# Altium PCB ZMBo 1.1.PcbDoc (part 3 of 4)
Units mil, origin at the board's own origin, x right, y up, seen from the top; angles counter-clockwise.
Board outline 6000 x 4000 mil, 4 copper layers (Top Layer, Groun Plane, Power Plane, Bottom Layer); 280 components, 251 nets, 1047 pads, 1788 vias.
Unrouted connection lines stored in the file: 231.
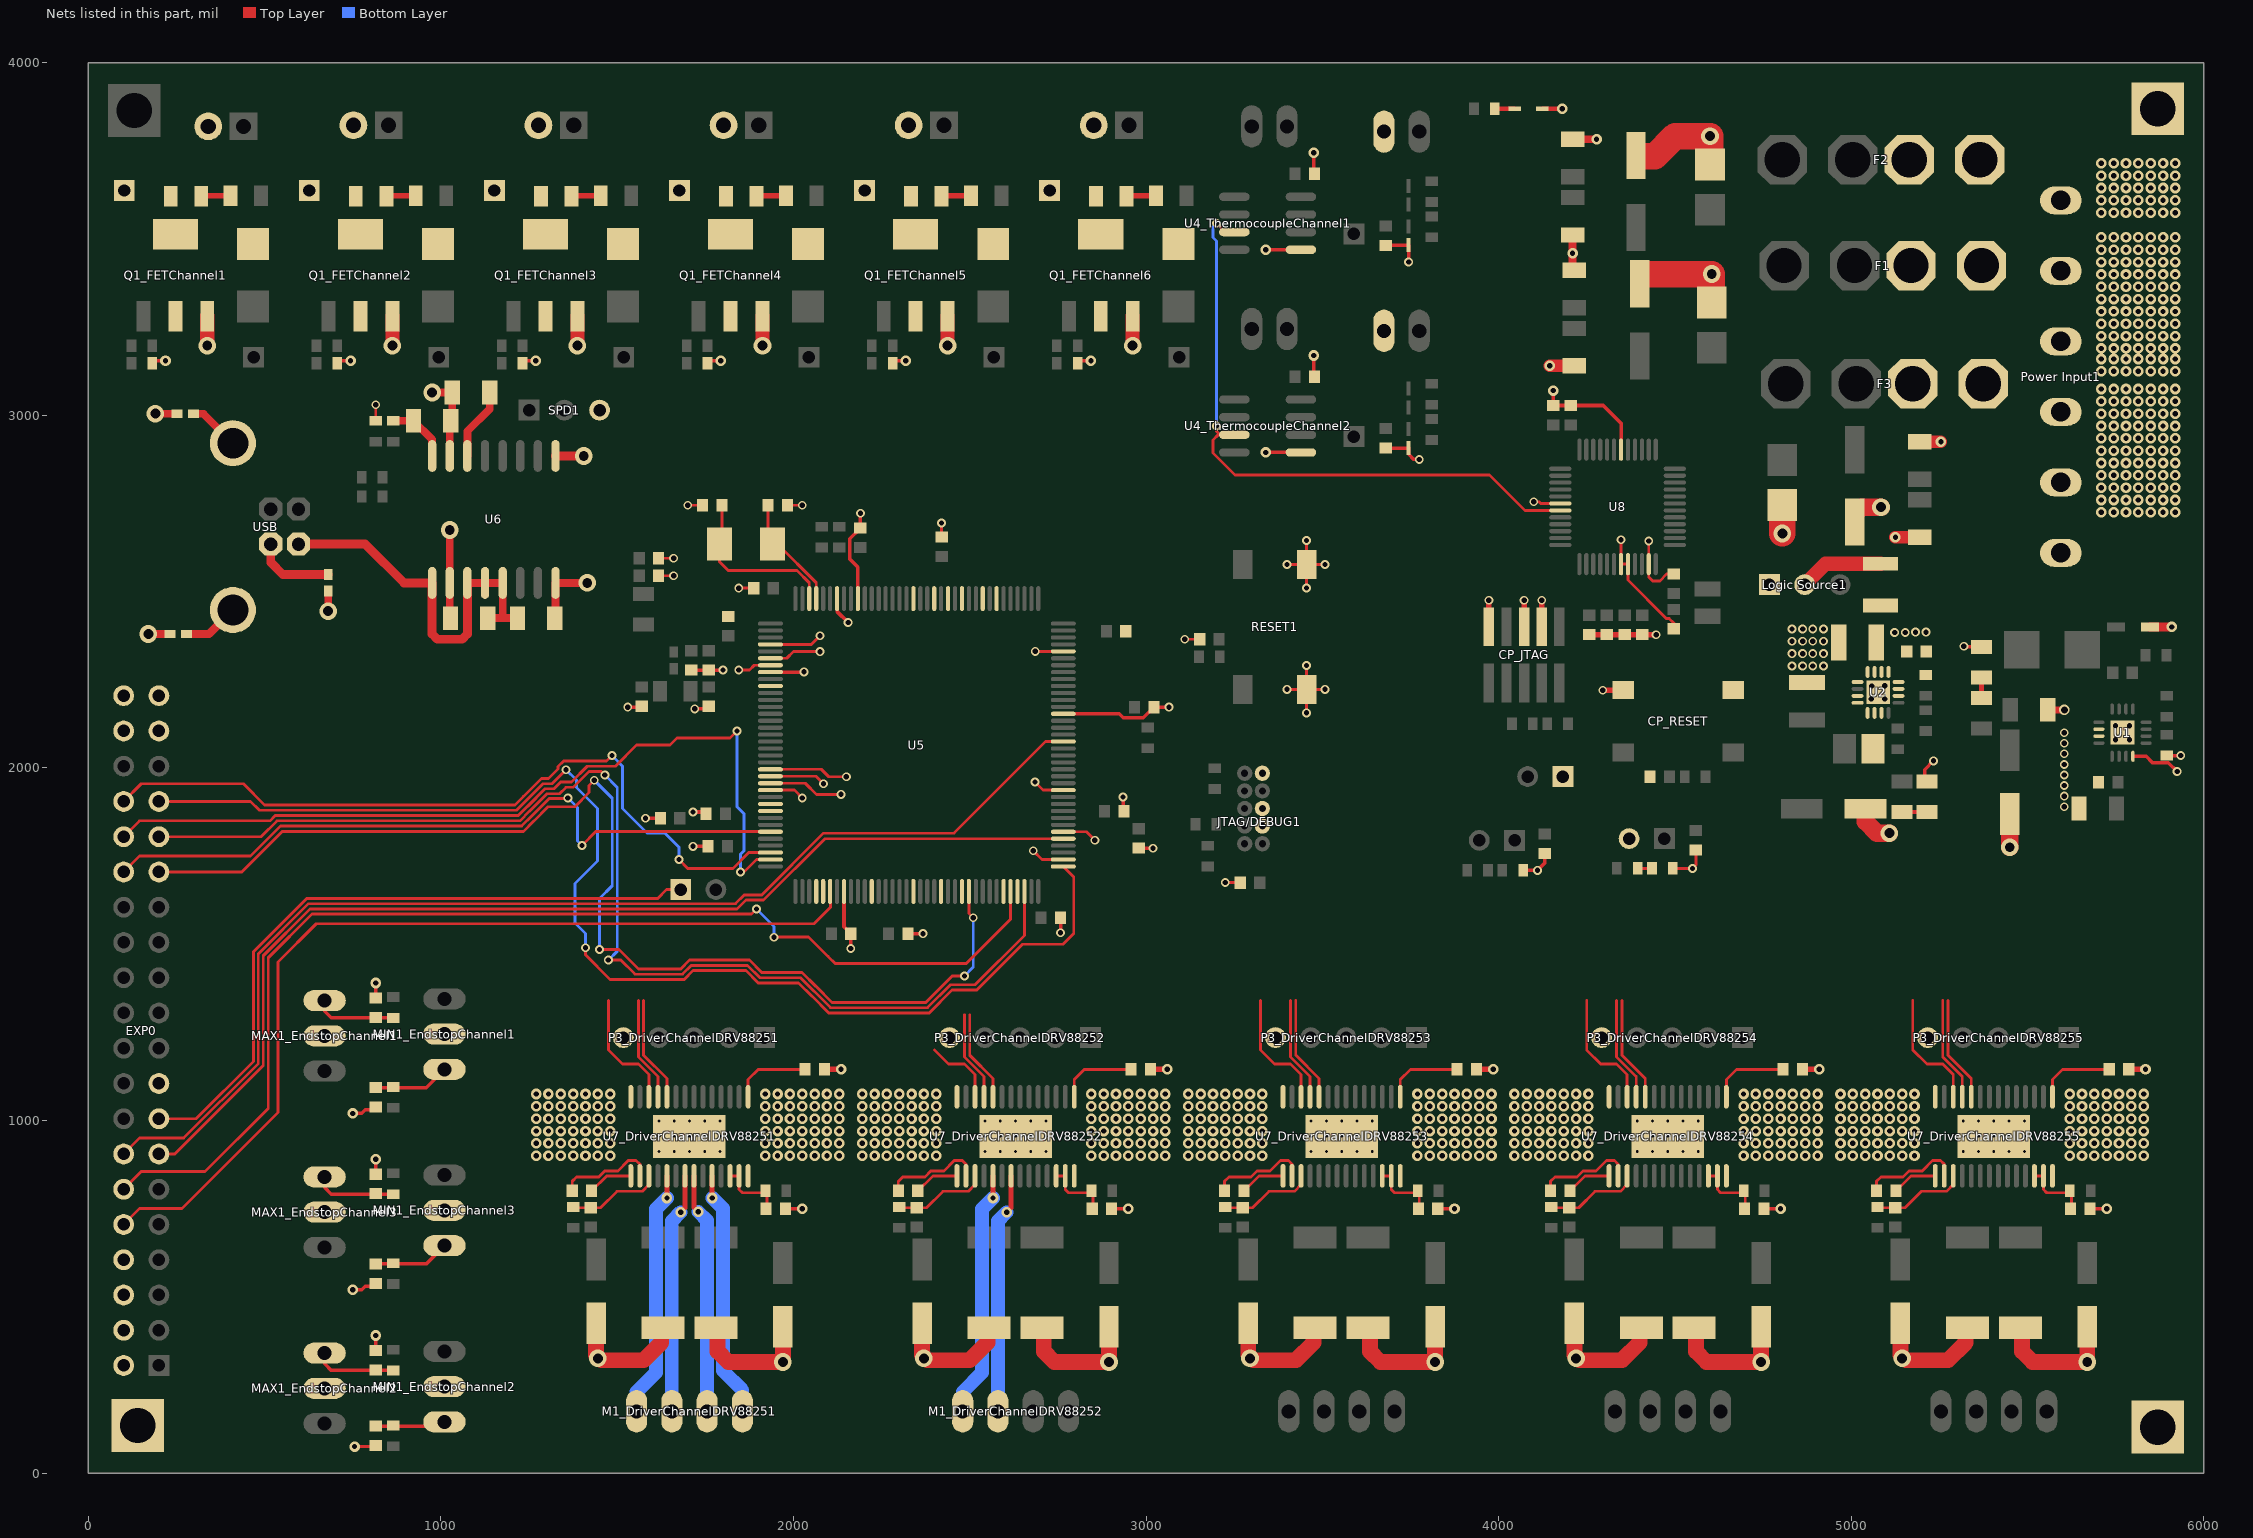
[diagram p5: the nets of this part, all layers, seen from the top]

## Via types
v1: diameter 30, hole 15, Top Layer to Bottom Layer, 1271 vias
v2: diameter 25, hole 15, Top Layer to Bottom Layer, 410 vias
v3: diameter 19.68, hole 7.87, Top Layer to Bottom Layer, 75 vias
v4: diameter 50, hole 28, Top Layer to Bottom Layer, 30 vias
v5: diameter 30, hole 20, Top Layer to Bottom Layer, 2 vias

## Nets (pads, with @x,y where several pads share a name; then routed paths per layer and width w, separated by ;. In a path a pad name is that pad's centre, name@x,y a point inside that pad or via, vN(x,y) a via of type N, cw(c..) or ccw(c..) an arc to the next point about the centre after c; other vN are vias at no path point) (continued)
GND: "Power Input1.2" "Power Input1.4" "Power Input1.6" C1_EndstopChannel1.2 C1_EndstopChannel2.2 C1_EndstopChannel3.2 C2_EndstopChannel1.2 C2_EndstopChannel2.2 C2_EndstopChannel3.2 C3.2 C4.2 C5.1 C6.1 C8.1 C9.2 C10.1 C11.1 C12.2 C14.1 C15.1 C16.2 C18.1 C19.1 C22.2 C23.2 C24.1 C30_ThermistorChannel1.1 C30_ThermistorChannel2.1 C31_ThermocoupleChannel1.1 C31_ThermocoupleChannel2.1 C32.1 C33.1 C36.1 C37.1 C38.1 C39.1 C40.1 C41.1 C42.1 C43.1 C44.1 C45.1 C46.1 C47.1 C48.1 C49.1 C50.1 C51.1 C54.1 C55.1 C56.1 C57.1 C60.1 C61.1 C62.1 C63.1 C64.1 C65.1 C67_DriverChannelDRV88251.1 C67_DriverChannelDRV88252.1 C67_DriverChannelDRV88253.1 C67_DriverChannelDRV88254.1 C67_DriverChannelDRV88255.1 C69_DriverChannelDRV88251.2 C69_DriverChannelDRV88252.2 C69_DriverChannelDRV88253.2 C69_DriverChannelDRV88254.2 C69_DriverChannelDRV88255.2 C70_DriverChannelDRV88251.2 C70_DriverChannelDRV88252.2 C70_DriverChannelDRV88253.2 C70_DriverChannelDRV88254.2 C70_DriverChannelDRV88255.2 C71_DriverChannelDRV88251.1 C71_DriverChannelDRV88252.1 C71_DriverChannelDRV88253.1 C71_DriverChannelDRV88254.1 C71_DriverChannelDRV88255.1 C72.2 C73.2 C74.1 C75.1 C76.1 C77.1 C78.2 C79.2 C80.2 CP_JTAG.3 CP_JTAG.5 CP_JTAG.9 CP_RESET.1 D1.1 D4.1 D5.1 D6.1 D7.1 D8.1 D9.1 D12_ThermistorChannel1.1 D12_ThermistorChannel2.1 EXP0.2 EXP0.4 EXP0.6 EXP0.8 JTAG/DEBUG1.3 JTAG/DEBUG1.5 JTAG/DEBUG1.9 MAX1_EndstopChannel1.2 MAX1_EndstopChannel2.2 MAX1_EndstopChannel3.2 MIN1_EndstopChannel1.2 MIN1_EndstopChannel2.2 MIN1_EndstopChannel3.2 P2_ThermistorChannel1.2 P2_ThermistorChannel2.2 P3_DriverChannelDRV88251.5 P3_DriverChannelDRV88252.5 P3_DriverChannelDRV88253.5 P3_DriverChannelDRV88254.5 P3_DriverChannelDRV88255.5 pad.@140,135 pad.@5870,130 pad.@5870,3870 Q1_FETChannel1.3 Q1_FETChannel2.3 Q1_FETChannel3.3 Q1_FETChannel4.3 Q1_FETChannel5.3 Q1_FETChannel6.3 R6_FETChannel1.2 R6_FETChannel2.2 R6_FETChannel3.2 R6_FETChannel4.2 R6_FETChannel5.2 R6_FETChannel6.2 R10.1 R15.2 R28.1 R29.2 R32_DriverChannelDRV88251.1 R32_DriverChannelDRV88252.1 R32_DriverChannelDRV88253.1 R32_DriverChannelDRV88254.1 R32_DriverChannelDRV88255.1 R33_DriverChannelDRV88251.1 R33_DriverChannelDRV88252.1 R33_DriverChannelDRV88253.1 R33_DriverChannelDRV88254.1 R33_DriverChannelDRV88255.1 R38.1 RESET1.2 SPD1.3 U1.4 U1.14 U1.15 U1.17 U2.6 U2.7 U2.8 U2.15 U2.16 U2.17 U4_ThermocoupleChannel1.1 U4_ThermocoupleChannel2.1 U5.8 U5.44 U5.61 U5.95 U5.104 U5.115 U5.135 U5.138 U6.9 U6.15 U7_DriverChannelDRV88251.14 U7_DriverChannelDRV88251.28 U7_DriverChannelDRV88251.29 U7_DriverChannelDRV88252.14 U7_DriverChannelDRV88252.28 U7_DriverChannelDRV88252.29 U7_DriverChannelDRV88253.14 U7_DriverChannelDRV88253.28 U7_DriverChannelDRV88253.29 U7_DriverChannelDRV88254.14 U7_DriverChannelDRV88254.28 U7_DriverChannelDRV88254.29 U7_DriverChannelDRV88255.14 U7_DriverChannelDRV88255.28 U7_DriverChannelDRV88255.29 U8.7 U8.8 U8.11 U8.30 | length 11511.3
  Top Layer w8: v1(755,75) 812.09,75 C1_EndstopChannel2.2@815,77.91 ; R15.2@815,2984.53 v2(815,3030) ; v4@1404.88,2885.12 v4(1405,2885) ; C32.1@1617.56,2545 v2(1660,2545) ; C33.1@1617.56,2595 v2(1660,2595) ; v2(1700,2745) C44.1@1742.44,2745 ; v2(1845,2510) C51.1@1887.44,2510 ; C43.1@1982.56,2745 v2(2025,2745) ; C42.1@2420,2655.12 v2(2420,2695) ; v2@2685,2330 v2(2685.75,2330.75) U5.104@2765.35,2330.75 ; v2(3110,2365) C63.1@3152.44,2365 ; v2(3225,1675) C62.1@3267.44,1675 ; v2(3400,2222.83) RESET1.2@3455.55,2222.83 ; v2(3400,2577.17) RESET1.2@3455.55,2577.17 ; v2(3455.55,2156.22) RESET1.2@3455.55,2222.83 ; v2(3455.55,2290.67) RESET1.2@3455.55,2222.83 ; v2(3455.55,2510.55) RESET1.2@3455.55,2577.17 ; v2(3455.55,2645) RESET1.2@3455.55,2577.17 ; v2(3507.83,2222.83) RESET1.2@3455.55,2222.83 ; v2(3507.83,2577.17) RESET1.2@3455.55,2577.17 ; v2(4347.44,2647.44) U8.7@4347.44,2578.07 U8.8@4367.13,2578.07 4367.13,2532.75 4475.74,2424.14 4484.02,2424.14 4497.6,2410.55 C72.2@4497.6,2394.77 ; v2(4426.18,2643.82) U8.11@4426.18,2578.07 4426.18,2541.97 4437.6,2530.55 4457.6,2530.55 4476.93,2549.88 C73.2@4497.6,2549.88 ; R29.2@4494.53,1715 v2(4550,1715) 4560,1725 C60.1@4560,1767.44
  Top Layer w10: R6_FETChannel1.2@188.22,3155 v1(218.69,3155) ; R6_FETChannel2.2@713.22,3155 v1(743.69,3155) ; v1(750,520) 775,520 785,530 815,530 C1_EndstopChannel3.2@815,537.91 ; v1(750,1020) 775,1020 785,1030 815,1030 C1_EndstopChannel1.2@815,1037.91 ; C2_EndstopChannel2.2@815,347.56 v1(815,390) ; C2_EndstopChannel3.2@815,847.56 v1(815,890) ; C2_EndstopChannel1.2@815,1347.56 v1(815,1390) ; C57.1@1025,2981.85 C57.1@1028.15,2985 C57.1@1031.85,2988.7 ; R6_FETChannel3.2@1238.22,3155 v1(1268.69,3155) ; v2(1530,2172.56) 1567.56,2172.56 C64.1@1570,2175 ; v2(1580,1857.56) C45.1@1622.44,1857.56 ; C54.1@1710,2277.44 1710.12,2277.56 v2(1800,2277.56) ; v2(1715,1777.56) C39.1@1757.44,1777.56 ; v2(1715,1875) C40.1@1752.44,1875 ; v2(1720,2167.56) 1752.56,2167.56 C65.1@1760,2175 ; R6_FETChannel4.2@1763.22,3155 v1(1793.69,3155) ; U5.8@1934.65,2271.69 2029.13,2271.69 v2(2030,2272.56) ; C67_DriverChannelDRV88251.1@1977.56,750 v1(2025,750) ; U5.138@2123.62,2480.35 2123.62,2443.94 v2(2155,2412.56) ; U5.44@2143.31,1649.65 2143.31,1549.25 C46.1@2162.56,1530 v2(2162.56,1487.56) ; U5.135@2182.68,2480.35 2182.68,2569.88 2160,2592.56 2160,2650.12 C50.1@2190,2680.12 v2(2190,2722.56) ; R6_FETChannel5.2@2288.22,3155 v1(2318.69,3155) ; C41.1@2325,1530 v2(2367.44,1530) ; v2(2757.56,1532.56) C47.1@2757.56,1575 ; U5.95@2765.35,2153.58 2923.98,2153.58 2935,2142.56 2992.56,2142.56 C49.1@3022.56,2172.56 v2(3065,2172.56) ; R6_FETChannel6.2@2813.22,3155 v1(2843.69,3155) ; C67_DriverChannelDRV88252.1@2902.56,750 v1(2950,750) ; v2(2935,1917.56) 2935,1880.12 C38.1@2937.56,1877.56 ; C48.1@2980,1772.44 v2(3020,1772.44) ; v1(3340,2895) U4_ThermocoupleChannel2.1@3439.49,2895 ; v1(3340,3470) U4_ThermocoupleChannel1.1@3439.49,3470 ; C31_ThermocoupleChannel2.1@3475.51,3112.56 v1(3475.51,3170) ; C31_ThermocoupleChannel1.1@3475.51,3687.56 v1(3475.51,3745) ; C30_ThermistorChannel2.1@3680,2907.44 3744.49,2907.44 D12_ThermistorChannel2.1@3745,2907.95 3745,2890 3760,2875 v2(3775,2875) ; C30_ThermistorChannel1.1@3680,3482.44 3744.49,3482.44 D12_ThermistorChannel1.1@3745,3482.95 v2(3745,3435) ; C67_DriverChannelDRV88253.1@3827.56,750 v1(3875,750) ; R28.1@4070,1709.53 v2(4110.47,1709.53) 4130.47,1729.53 C61.1@4130.47,1756.97 ; v1(4155.04,3070.55) C76.1@4155.04,3028.11 C77.1@4205.04,3028.11 4297.48,3028.11 4347.44,2978.15 U8.30@4347.44,2902.87 ; C67_DriverChannelDRV88254.1@4752.56,750 v1(4800,750) ; D9.1@5215.08,1961.69 5208.58,1968.19 5208.58,1995.04 v2(5233.58,2020.04) ; v2(5320,2345) 5321.61,2343.39 D7.1@5370,2343.39 ; C67_DriverChannelDRV88255.1@5677.56,750 v1(5725,750) ; U1.4@5799.53,2033.07 5836.93,2033.07 5855,2015 5900,2015 v2(5925,1990) ; R10.1@5895.47,2035 v2(5935,2035)
  Top Layer w12: D1.1@4124.37,3870 v1(4180.47,3870)
  Top Layer w15: C71_DriverChannelDRV88251.1@2087.56,1145 v1(2135.12,1145) ; C71_DriverChannelDRV88252.1@3012.56,1145 v1(3060.12,1145) ; C71_DriverChannelDRV88253.1@3937.56,1145 v1(3985.12,1145) ; CP_JTAG.9@3972.6,2400.39 v2(3972.6,2475.47) ; CP_JTAG.5@4072.6,2400.39 v2(4072.6,2475.47) ; CP_JTAG.3@4122.6,2400.39 v2(4122.6,2475.47) ; C75.1@4257.6,2377.99 C74.1@4307.6,2377.99 v2(4447.01,2377.99) ; v2(4295.55,2220.55) CP_RESET.1@4354.13,2220.55 ; C71_DriverChannelDRV88254.1@4862.56,1145 v1(4910.12,1145) ; C71_DriverChannelDRV88255.1@5787.56,1145 v1(5835.12,1145)
  Top Layer w20: C8.1@5558.15,2165 v5(5605,2165)
  Top Layer w22: v4(975,3065) C56.1@1031.85,3065 C57.1@1031.85,2988.7 ; U6.15@1025,2885.12 C57.1@1025,2981.85 ; C14.1@4210,3416.81 C6.1@4210,3511.85 ; C5.1@4210,3783.15 v1(4278.15,3783.15)
  Top Layer w25: U6.9@1325,2885.12 v4@1404.88,2885.12 ; D5.1@5848.23,2400 v1(5910,2400)
  Top Layer w35: v1(4145,3140.51) C15.1@4215,3140.51 ; v1(5125.79,2654.21) C18.1@5195,2654.21 ; C19.1@5195,2925.51 v1@5254.49,2925.51
  Top Layer w40: v4@337.24,3198.08 Q1_FETChannel1.3@337.24,3281.86 ; v4@862.24,3198.08 Q1_FETChannel2.3@862.24,3281.86 ; v4@1387.24,3198.08 Q1_FETChannel3.3@1387.24,3281.86 ; v4@1912.24,3198.08 Q1_FETChannel4.3@1912.24,3281.86 ; v4@2437.24,3198.08 Q1_FETChannel5.3@2437.24,3281.86 ; v4@2962.24,3198.08 Q1_FETChannel6.3@2962.24,3281.86
  Top Layer w45: C69_DriverChannelDRV88251.2@1440,414.45 1440,335 1455,320 1575,320 1625,370 R33_DriverChannelDRV88251.1@1625,412.05 ; R32_DriverChannelDRV88251.1@1785,412.05 1785,345 1815,315 v4(1970,315) C70_DriverChannelDRV88251.2@1970,414.45 ; C69_DriverChannelDRV88252.2@2365,414.45 2365,335 2380,320 2500,320 2550,370 R33_DriverChannelDRV88252.1@2550,412.05 ; R32_DriverChannelDRV88252.1@2710,412.05 2710,345 2740,315 v4(2895,315) C70_DriverChannelDRV88252.2@2895,414.45 ; C69_DriverChannelDRV88253.2@3290,414.45 3290,335 3305,320 3425,320 3475,370 R33_DriverChannelDRV88253.1@3475,412.05 ; R32_DriverChannelDRV88253.1@3635,412.05 3635,345 3665,315 v4(3820,315) C70_DriverChannelDRV88253.2@3820,414.45 ; C69_DriverChannelDRV88254.2@4215,414.45 4215,335 4230,320 4350,320 4400,370 R33_DriverChannelDRV88254.1@4400,412.05 ; R32_DriverChannelDRV88254.1@4560,412.05 4560,345 4590,315 v4(4745,315) C70_DriverChannelDRV88254.2@4745,414.45 ; C69_DriverChannelDRV88255.2@5140,414.45 5140,335 5155,320 5275,320 5325,370 R33_DriverChannelDRV88255.1@5325,412.05 ; R32_DriverChannelDRV88255.1@5485,412.05 5485,345 5515,315 v4(5670,315) C70_DriverChannelDRV88255.2@5670,414.45
  Top Layer w50: C16.2@5010,2697.64 5010,2720 5030,2740 v4(5085,2740) ; C23.2@5041.13,1884.31 5041.13,1847.49 5073.58,1815.04 v4(5108.58,1815.04) ; v4(5450,1775) C9.2@5450,1869.45
  Top Layer w75: C3.2@4405,3735 4443.5,3735 4500.86,3792.36 v4(4600,3792.36) D4.1@4600,3711.34 ; 4427.64,3401.02 v4(4605,3401.02) D6.1@4605,3320 ; v4(4805,2665) D8.1@4805,2746.02
  other v1: 1270,900 1305,900 1340,900 1375,900 1410,900 1445,900 1480,900 1920,900 1955,900 1990,900 2025,900 2060,900 2095,900 2130,900 2195,900 2230,900 2265,900 2300,900 2335,900 2370,900 2405,900 2845,900 2880,900 2915,900 2950,900 2985,900 3020,900 3055,900 3120,900 3155,900 3190,900 3225,900 3260,900 3295,900 3330,900 3770,900 3805,900 3840,900 3875,900 3910,900 3945,900 3980,900 4045,900 4080,900 4115,900 4150,900 4185,900 4220,900 4255,900 4695,900 4730,900 4765,900 4800,900 4835,900 4870,900 4905,900 4970,900 5005,900 5040,900 5075,900 5110,900 5145,900 5180,900 5620,900 5655,900 5690,900 5725,900 5760,900 5795,900 5830,900 1270,935 1305,935 1340,935 1375,935 1410,935 1445,935 1480,935 1920,935 1955,935 1990,935 2025,935 2060,935 2095,935 2130,935 2195,935 2230,935 2265,935 2300,935 2335,935 2370,935 2405,935 2845,935 2880,935 2915,935 2950,935 2985,935 3020,935 3055,935 3120,935 3155,935 3190,935 3225,935 3260,935 3295,935 3330,935 3770,935 3805,935 3840,935 3875,935 3910,935 3945,935 3980,935 4045,935 4080,935 4115,935 4150,935 4185,935 4220,935 4255,935 4695,935 4730,935 4765,935 4800,935 4835,935 4870,935 4905,935 4970,935 5005,935 5040,935 5075,935 5110,935 5145,935 5180,935 5620,935 5655,935 5690,935 5725,935 5760,935 5795,935 5830,935 1270,970 1305,970 1340,970 1375,970 1410,970 1445,970 1480,970 1920,970 1955,970 1990,970 2025,970 2060,970 2095,970 2130,970 2195,970 2230,970 2265,970 2300,970 2335,970 2370,970 2405,970 2845,970 2880,970 2915,970 2950,970 2985,970 3020,970 3055,970 3120,970 3155,970 3190,970 3225,970 3260,970 3295,970 3330,970 3770,970 3805,970 3840,970 3875,970 3910,970 3945,970 3980,970 4045,970 4080,970 4115,970 4150,970 4185,970 4220,970 4255,970 4695,970 4730,970 4765,970 4800,970 4835,970 4870,970 4905,970 4970,970 5005,970 5040,970 5075,970 5110,970 5145,970 5180,970 5620,970 5655,970 5690,970 5725,970 5760,970 5795,970 5830,970 1270,1005 1305,1005 1340,1005 1375,1005 1410,1005 1445,1005 1480,1005 1920,1005 1955,1005 1990,1005 2025,1005 2060,1005 2095,1005 2130,1005 2195,1005 2230,1005 2265,1005 2300,1005 2335,1005 2370,1005 2405,1005 2845,1005 2880,1005 2915,1005 2950,1005 2985,1005 3020,1005 3055,1005 3120,1005 3155,1005 3190,1005 3225,1005 3260,1005 3295,1005 3330,1005 3770,1005 3805,1005 3840,1005 3875,1005 3910,1005 3945,1005 3980,1005 4045,1005 4080,1005 4115,1005 4150,1005 4185,1005 4220,1005 4255,1005 4695,1005 4730,1005 4765,1005 4800,1005 4835,1005 4870,1005 4905,1005 4970,1005 5005,1005 5040,1005 5075,1005 5110,1005 5145,1005 5180,1005 5620,1005 5655,1005 5690,1005 5725,1005 5760,1005 5795,1005 5830,1005 1270,1040 1305,1040 1340,1040 1375,1040 1410,1040 1445,1040 1480,1040 1920,1040 1955,1040 1990,1040 2025,1040 2060,1040 2095,1040 2130,1040 2195,1040 2230,1040 2265,1040 2300,1040 2335,1040 2370,1040 2405,1040 2845,1040 2880,1040 2915,1040 2950,1040 2985,1040 3020,1040 3055,1040 3120,1040 3155,1040 3190,1040 3225,1040 3260,1040 3295,1040 3330,1040 3770,1040 3805,1040 3840,1040 3875,1040 3910,1040 3945,1040 3980,1040 4045,1040 4080,1040 4115,1040 4150,1040 4185,1040 4220,1040 4255,1040 4695,1040 4730,1040 4765,1040 4800,1040 4835,1040 4870,1040 4905,1040 4970,1040 5005,1040 5040,1040 5075,1040 5110,1040 5145,1040 5180,1040 5620,1040 5655,1040 5690,1040 5725,1040 5760,1040 5795,1040 5830,1040 1270,1075 1305,1075 1340,1075 1375,1075 1410,1075 1445,1075 1480,1075 1920,1075 1955,1075 1990,1075 2025,1075 2060,1075 2095,1075 2130,1075 2195,1075 2230,1075 2265,1075 2300,1075 2335,1075 2370,1075 2405,1075 2845,1075 2880,1075 2915,1075 2950,1075 2985,1075 3020,1075 3055,1075 3120,1075 3155,1075 3190,1075 3225,1075 3260,1075 3295,1075 3330,1075 3770,1075 3805,1075 3840,1075 3875,1075 3910,1075 3945,1075 3980,1075 4045,1075 4080,1075 4115,1075 4150,1075 4185,1075 4220,1075 4255,1075 4695,1075 4730,1075 4765,1075 4800,1075 4835,1075 4870,1075 4905,1075 4970,1075 5005,1075 5040,1075 5075,1075 5110,1075 5145,1075 5180,1075 5620,1075 5655,1075 5690,1075 5725,1075 5760,1075 5795,1075 5830,1075 5255,2925 4210,3460
  other v2: 5605,1890 5605,1920 5605,1950 5605,1980 5605,2010 5605,2040 5605,2070 5750,2080 5790,2080 5605,2100 5750,2120 5790,2120 5057.58,2195.31 5095.58,2195.31 5058.58,2232.31 5095.58,2233.31 4832.58,2289.31 4862.58,2289.31 4891.58,2289.31 4921.58,2289.31 4832.58,2324.31 4862.58,2324.31 4891.58,2324.31 4921.58,2324.31 4832.58,2359.31 4862.58,2359.31 4891.58,2359.31 4921.58,2359.31 5123.58,2384.31 5153.58,2384.31 5182.58,2385.31 5212.58,2385.31 4832.58,2394.31 4862.58,2394.31 4891.58,2394.31 4921.58,2394.31
  other v3: 1618.39,911.69 1661.69,911.69 1705,911.69 1748.31,911.69 1791.61,911.69 2543.39,911.69 2586.69,911.69 2630,911.69 2673.31,911.69 2716.61,911.69 3468.39,911.69 3511.69,911.69 3555,911.69 3598.31,911.69 3641.61,911.69 4393.39,911.69 4436.69,911.69 4480,911.69 4523.31,911.69 4566.61,911.69 5318.39,911.69 5361.69,911.69 5405,911.69 5448.31,911.69 5491.61,911.69 1618.39,955 1661.69,955 1705,955 1748.31,955 1791.61,955 2543.39,955 2586.69,955 2630,955 2673.31,955 2716.61,955 3468.39,955 3511.69,955 3555,955 3598.31,955 3641.61,955 4393.39,955 4436.69,955 4480,955 4523.31,955 4566.61,955 5318.39,955 5361.69,955 5405,955 5448.31,955 5491.61,955 1618.39,998.31 1661.69,998.31 1705,998.31 1748.31,998.31 1791.61,998.31 2543.39,998.31 2586.69,998.31 2630,998.31 2673.31,998.31 2716.61,998.31 3468.39,998.31 3511.69,998.31 3555,998.31 3598.31,998.31 3641.61,998.31 4393.39,998.31 4436.69,998.31 4480,998.31 4523.31,998.31 4566.61,998.31 5318.39,998.31 5361.69,998.31 5405,998.31 5448.31,998.31 5491.61,998.31
  other v4: 1445,325 2370,325 3295,325 4220,325 5145,325 337.17,3198 862.17,3198 1387.17,3198 1912.17,3198 2437.17,3198 2962.17,3198
GPIO0_EXP: EXP0.37 U5.7 | length 95.4
  Top Layer w8: v2(1845,2277.56) 1875,2277.56 1888.82,2291.38 U5.7@1934.65,2291.38
GPIO1_EXP: EXP0.38 U5.10
GPIO2_EXP: EXP0.39 U5.27
GPIO3_EXP: EXP0.40 U5.28
I2C_SCL: EXP0.13 U5.77 | length 3118.1
  Top Layer w8: EXP0.13@200,905 245,905 496,1156 496,1467.21 628.79,1600 1840,1600 1865,1625 1915,1625 2089.25,1799.25 U5.77@2765.35,1799.25
I2C_SDA: EXP0.14 U5.91 | length 3332.2
  Top Layer w8: EXP0.14@100,905 145,950 270.2,950 482,1161.8 482,1473.01 623.99,1615 1835.2,1615 1860.2,1640 1910,1640 2085,1815 2455,1815 2714.84,2074.84 U5.91@2765.35,2074.84
INPUT_GND: C58.1 C59.1 FB6.1 FB7.1 FB8.1 U6.2 U6.8 | length 625.4
  Top Layer w22: v4(170,2380) FB6.1@231.38,2380 ; v4(190,3005) FB8.1@251.38,3005 ; v4(680,2445) FB7.1@680,2501.38 ; v4@1025,2680 U6.2@1025,2524.88 1025,2426.85 C59.1@1026.85,2425 ; C58.1@1323.15,2425 1325,2426.85 U6.8@1325,2524.88 v4(1414.88,2524.88)
  other v4: 1025,2675
KRESET: EXP0.15 kRESET.1 P4.1 | length 1931.5
  Top Layer w8: EXP0.15@200,1005 305.4,1005 468,1167.6 468,1478.8 619.2,1630 1615,1630 1640,1655 kRESET.1@1680,1655
MAX_ES: C2_EndstopChannel1.1 C2_EndstopChannel2.1 C2_EndstopChannel3.1 MAX1_EndstopChannel1.1 MAX1_EndstopChannel2.1 MAX1_EndstopChannel3.1 R3_EndstopChannel1.2 R3_EndstopChannel2.2 R3_EndstopChannel3.2 | length 698.7
  Top Layer w10: MAX1_EndstopChannel2.1@670,340 670,310 689.06,290.94 R3_EndstopChannel2.2@865,290.94 ; MAX1_EndstopChannel3.1@670,840 670,810 689.06,790.94 R3_EndstopChannel3.2@865,790.94 ; MAX1_EndstopChannel1.1@670,1340 670,1310 689.06,1290.95 R3_EndstopChannel1.2@865,1290.95
MAX_ES1: U5.24 | length 213.5
  Top Layer w8: U5.24@1934.65,1956.73 2033.27,1956.73 2065,1925 v2(2135,1925)
MAX_ES2: U5.22 | length 224.1
  Top Layer w8: U5.22@1934.65,1996.1 2078.9,1996.1 2100,1975 v2(2150,1975)
MAX_ES3: U5.4 | length 150.5
  Top Layer w8: U5.4@1934.65,2350.43 2050.43,2350.43 v2(2075,2375)
MIN_ES: C1_EndstopChannel1.1 C1_EndstopChannel2.1 C1_EndstopChannel3.1 MIN1_EndstopChannel1.1 MIN1_EndstopChannel2.1 MIN1_EndstopChannel3.1 R2_EndstopChannel1.2 R2_EndstopChannel2.2 R2_EndstopChannel3.2 | length 633
  Top Layer w10: C1_EndstopChannel2.1@815,133.03 998.03,133.03 MIN1_EndstopChannel2.1@1010,145 ; C1_EndstopChannel3.1@815,593.03 958.03,593.03 MIN1_EndstopChannel3.1@1010,645 ; C1_EndstopChannel1.1@815,1093.03 958.03,1093.03 MIN1_EndstopChannel1.1@1010,1145
MIN_ES1: U5.25 | length 99.5
  Top Layer w8: U5.25@1934.65,1937.05 2002.95,1937.05 v2(2025,1915)
MIN_ES2: U5.23 | length 159.2
  Top Layer w8: U5.23@1934.65,1976.42 2063.58,1976.42 v2(2085,1955)
MIN_ES3: U5.6 | length 148.2
  Top Layer w8: U5.6@1934.65,2311.06 1981.06,2311.06 2000,2330 v2(2075,2330)
MISO: EXP0.12 U4_ThermocoupleChannel1.7 U4_ThermocoupleChannel2.7 U5.68 U8.43 | length 5137.3
  Top Layer w8: EXP0.12@100,805 150,855 330.6,855 510,1034.4 510,1461.41 634.59,1586 1881,1586 v2(1895,1600) ; v2(1945,1520) 2043.06,1520 2098.12,1464.94 2098.45,1464.94 2118.39,1445 2490,1445 2615.75,1570.75 U5.68@2615.75,1649.65 ; v2(3200,2970) 3200,2955 U4_ThermocoupleChannel2.7@3210,2945 ; v2(3200,3545) 3225,3520 U4_ThermocoupleChannel1.7@3250.51,3520 ; U4_ThermocoupleChannel2.7@3250.51,2945 U4_ThermocoupleChannel2.7@3210,2945 ; U8.43@4175.2,2730.63 4075,2730.63 3974.63,2831 3252.17,2831 3190,2893.17 3190,2930 3205,2945 U4_ThermocoupleChannel2.7@3210,2945
  Bottom Layer w8: v2(1895,1600) 1945,1550 v2(1945,1520) ; v2(3200,2970) 3200,3495 3190,3505 3190,3535 v2(3200,3545)
MOD0E1: U5.117
MOD0E2: U5.120
MOD0E3: U5.122
MOD0E4: U5.124
MOD0E5: U5.127
MOD1E1: U5.40
MOD1E2: U5.41
MOD1E3: U5.48
MOD1E4: U5.54
MOD1E5: U5.58
MOD2E1: U5.67
MOD2E2: U5.69
MOD2E3: U5.74 | length 95.6
  Top Layer w8: v2(2680,1765) 2704.8,1740.2 U5.74@2765.35,1740.2
MOD2E4: U5.78 | length 99.6
  Top Layer w8: U5.78@2765.35,1818.94 2831.06,1818.94 v2(2855,1795)
MOD2E5: U5.84 | length 89.9
  Top Layer w8: v2(2685,1960) 2707.95,1937.05 U5.84@2765.35,1937.05
MODE0: U7_DriverChannelDRV88251.24 U7_DriverChannelDRV88252.24 U7_DriverChannelDRV88253.24 U7_DriverChannelDRV88254.24 U7_DriverChannelDRV88255.24 | length 1460.7
  Top Layer w8: 1575,1340 1575,1185 1641.02,1118.98 U7_DriverChannelDRV88251.24@1641.02,1067.2 ; 2500,1300 2500,1185 2566.02,1118.98 U7_DriverChannelDRV88252.24@2566.02,1067.2 ; 3425,1340 3425,1185 3491.02,1118.98 U7_DriverChannelDRV88253.24@3491.02,1067.2 ; 4350,1340 4350,1185 4416.02,1118.98 U7_DriverChannelDRV88254.24@4416.02,1067.2 ; 5275,1340 5275,1185 5341.02,1118.98 U7_DriverChannelDRV88255.24@5341.02,1067.2
MODE0_EXP1: EXP0.29 U5.62 | length 3274.5
  Top Layer w8: EXP0.29@200,1705 434.8,1705 549.8,1820 1233.78,1820 1263.28,1849.5 1263.49,1849.5 1303.99,1890 1380,1890 1420,1930 1420,1950 v2(1435,1965) ; v2(1450,1485) 1505,1485 1560,1430 1680.4,1430 1705.4,1455 1875,1455 1910,1420 2024.27,1420 2063.33,1380.94 2063.66,1380.94 2109.6,1335 2375.4,1335 2450.4,1410 v2(2485,1410) ; U5.62@2497.64,1649.65 2497.64,1587.36 v2(2510,1575)
  Bottom Layer w8: v2(1435,1965) 1486,1914 1486,1666 1450,1630 v2(1450,1485) ; v2(2485,1410) 2510,1435 v2(2510,1575)
MODE0_EXP2: EXP0.30 U5.31 | length 2049.6
  Top Layer w8: EXP0.30@100,1705 145,1750 460,1750 545,1835 1228.98,1835 1257.48,1863.5 1257.7,1863.5 1307.2,1913 1358,1913 v2(1360,1915) ; v2(1400,1780) 1439.28,1819.28 1934.31,1819.28 U5.31@1934.65,1818.94
  Bottom Layer w8: v2(1360,1915) 1387.5,1887.5 1387.5,1792.5 v2(1400,1780)
MODE1: U7_DriverChannelDRV88251.25 U7_DriverChannelDRV88252.25 U7_DriverChannelDRV88253.25 U7_DriverChannelDRV88254.25 U7_DriverChannelDRV88255.25 | length 1438.8
  Top Layer w8: 1560,1340 1560,1180 1615.43,1124.57 U7_DriverChannelDRV88251.25@1615.43,1067.2 ; 2485,1300 2485,1180 2540.43,1124.57 U7_DriverChannelDRV88252.25@2540.43,1067.2 ; 3410,1340 3410,1180 3465.43,1124.57 U7_DriverChannelDRV88253.25@3465.43,1067.2 ; 4335,1340 4335,1180 4390.43,1124.57 U7_DriverChannelDRV88254.25@4390.43,1067.2 ; 5260,1340 5260,1180 5315.43,1124.57 U7_DriverChannelDRV88255.25@5315.43,1067.2
MODE1_EXP1: EXP0.31 U5.70 | length 3361.9
  Top Layer w8: EXP0.31@200,1805 490,1805 535,1850 1224.19,1850 1251.69,1877.5 1251.9,1877.5 1301.4,1927 1337,1927 1355,1945 1375,1945 1420,1990 1455,1990 v2(1465,1980) ; v2(1475,1455) 1510,1455 1550,1415 1685.2,1415 1710.2,1440 1870,1440 1905,1405 2019.47,1405 2057.53,1366.94 2057.86,1366.94 2104.8,1320 2380.2,1320 2445.2,1385 2515,1385 2655,1525 2655,1649.53 U5.70@2655.12,1649.65
  Bottom Layer w8: v2(1465,1980) 1500,1945 1500,1480 v2(1475,1455)
MODE1_EXP2: EXP0.32 U5.35 | length 2375.9
  Top Layer w8: EXP0.32@100,1805 145,1850 515,1850 530,1865 1219.39,1865 1245.89,1891.5 1246.1,1891.5 1295.6,1941 1321,1941 1340,1960 1370,1960 1415,2005 1495,2005 1555,2065 1650,2065 1670,2085 1820,2085 v2(1840,2105) ; v2(1850,1705) 1860,1705 1895.2,1740.2 U5.35@1934.65,1740.2
  Bottom Layer w8: v2(1840,2105) 1840,1890 1860,1870 1860,1765 1850,1755 v2(1850,1705)
MODE2: U7_DriverChannelDRV88251.26 U7_DriverChannelDRV88252.26 U7_DriverChannelDRV88253.26 U7_DriverChannelDRV88254.26 U7_DriverChannelDRV88255.26 | length 1593.6
  Top Layer w8: 1475,1340 1475,1200 1515,1160 1560,1160 1589.84,1130.16 U7_DriverChannelDRV88251.26@1589.84,1067.2 ; 2400,1200 2440,1160 2485,1160 2514.84,1130.16 U7_DriverChannelDRV88252.26@2514.84,1067.2 ; 3325,1340 3325,1200 3365,1160 3410,1160 3439.84,1130.16 U7_DriverChannelDRV88253.26@3439.84,1067.2 ; 4250,1340 4250,1200 4290,1160 4335,1160 4364.84,1130.16 U7_DriverChannelDRV88254.26@4364.84,1067.2 ; 5175,1340 5175,1200 5215,1160 5260,1160 5289.84,1130.16 U7_DriverChannelDRV88255.26@5289.84,1067.2
MODE2_EXP1: EXP0.33 U5.73 | length 3583.8
  Top Layer w8: EXP0.33@200,1905 460,1905 485,1880 1214.59,1880 1240.09,1905.5 1240.3,1905.5 1289.8,1955 1315,1955 v2(1355,1995) ; v2(1410,1490) 1410,1470 1480,1400 1690,1400 1715,1425 1865,1425 1900,1390 2014.67,1390 2051.73,1352.94 2052.06,1352.94 2100,1305 2385,1305 2450,1370 2520,1370 2650,1500 2765,1500 2795,1530 2795,1690.87 U5.73@2765.35,1720.51
  Bottom Layer w8: v2(1355,1995) 1384.5,1965.5 1384.5,1944.08 1444,1884.58 1444,1735.82 1380,1671.82 1380,1560 1410,1530 v2(1410,1490)
MODE2_EXP2: EXP0.34 U5.34 | length 2184.1
  Top Layer w8: EXP0.34@100,1905 150,1955 440,1955 500,1895 1209.79,1895 1234.29,1919.5 1234.5,1919.5 1285,1970 1305,1970 1332.5,1997.5 1332.5,2004.32 1348.18,2020 1470,2020 v2(1485,2035) ; v2(1675,1740) 1700,1715 1828.18,1715 1873.06,1759.88 U5.34@1934.65,1759.88
  Bottom Layer w8: v2(1485,2035) 1515,2005 1515,1885 1585,1815 1635,1815 1675,1775 v2(1675,1740)
MOSI: EXP0.10 U5.42 U8.42 | length 2750.2
  Top Layer w8: EXP0.10@100,705 145,750 265.2,750 538,1022.8 538,1449.81 646.19,1558 2058,1558 2105,1605 2105,1648.58 U5.42@2103.94,1649.65 ; v2(4100,2755) 4115,2755 4119.69,2750.32 U8.42@4175.2,2750.32
NetC22_1: C22.1 F4.1 U2.10 U2.11 U2.12 U2.13
NetC24_2: C24.2 U2.9
NetC43_2: C43.2 U5.141 X2.1 | length 330.2
  Top Layer w8: C43.2@1927.44,2745 1927.44,2647.56 X2.1@1940,2635 1955,2635 2064.57,2525.43 U5.141@2064.57,2480.35
NetC44_2: C44.2 U5.142 X2.2 | length 487.5
  Top Layer w8: X2.2@1790,2635 1790,2585 1815,2560 2010.2,2560 2044.88,2525.32 U5.142@2044.88,2480.35 ; X2.2@1790.39,2635 1790.39,2645.39 1797.56,2652.56 C44.2@1797.56,2745
NetC56_2: "Logic Source1.1" C56.2 U6.14 | length 206
  Top Layer w22: U6.14@1075,2885.12 1075,2955 1138.15,3018.15 C56.2@1138.15,3065
NetC57_2: C57.2 R16.2 U6.16 | length 178.9
  Top Layer w22: R16.2@865,2984.53 921.38,2984.53 C57.2@921.85,2985 975,2931.85 U6.16@975,2885.12
NetC58_2: C58.2 C59.2 U6.1 U6.3 U6.4 U6.5 USB.1 | length 1110.4
  Top Layer w22: U6.3@1075,2524.88 U6.4@1125,2524.88 U6.5@1175,2524.88 1175,2425 ; C59.2@1133.15,2425 1175,2425 ; C58.2@1216.85,2425 1175,2425
  Top Layer w25: USB.1@596,2635 785,2635 895.12,2524.88 U6.1@975,2524.88 975,2380 990,2365 1060,2365 1075,2380 U6.3@1075,2524.88
NetC66_DriverChannelDRV88251_2: C66_DriverChannelDRV88251.2 R30_DriverChannelDRV88251.2 U7_DriverChannelDRV88251.3 | length 266.8
  Top Layer w8: R30_DriverChannelDRV88251.2@1375,752.56 1452.56,752.56 1499,799 1570.92,799 1589.84,817.93 U7_DriverChannelDRV88251.3@1589.84,842.8
NetC66_DriverChannelDRV88252_2: C66_DriverChannelDRV88252.2 R30_DriverChannelDRV88252.2 U7_DriverChannelDRV88252.3 | length 266.8
  Top Layer w8: R30_DriverChannelDRV88252.2@2300,752.56 2377.56,752.56 2424,799 2495.92,799 2514.84,817.93 U7_DriverChannelDRV88252.3@2514.84,842.8
NetC66_DriverChannelDRV88253_2: C66_DriverChannelDRV88253.2 R30_DriverChannelDRV88253.2 U7_DriverChannelDRV88253.3 | length 266.8
  Top Layer w8: R30_DriverChannelDRV88253.2@3225,752.56 3302.56,752.56 3349,799 3420.92,799 3439.84,817.93 U7_DriverChannelDRV88253.3@3439.84,842.8
NetC66_DriverChannelDRV88254_2: C66_DriverChannelDRV88254.2 R30_DriverChannelDRV88254.2 U7_DriverChannelDRV88254.3 | length 266.8
  Top Layer w8: R30_DriverChannelDRV88254.2@4150,752.56 4227.56,752.56 4274,799 4345.92,799 4364.84,817.93 U7_DriverChannelDRV88254.3@4364.84,842.8
NetC66_DriverChannelDRV88255_2: C66_DriverChannelDRV88255.2 R30_DriverChannelDRV88255.2 U7_DriverChannelDRV88255.3 | length 266.8
  Top Layer w8: R30_DriverChannelDRV88255.2@5075,752.56 5152.56,752.56 5199,799 5270.92,799 5289.84,817.93 U7_DriverChannelDRV88255.3@5289.84,842.8
NetC67_DriverChannelDRV88251_2: C67_DriverChannelDRV88251.2 R31_DriverChannelDRV88251.1 U7_DriverChannelDRV88251.12 U7_DriverChannelDRV88251.13 | length 213.4
  Top Layer w8: U7_DriverChannelDRV88251.12@1820.16,842.8 U7_DriverChannelDRV88251.13@1845.75,842.8 1845.75,804.25 1855,795 1910,795 1925,810 C67_DriverChannelDRV88251.2@1925,750
NetC67_DriverChannelDRV88252_2: C67_DriverChannelDRV88252.2 R31_DriverChannelDRV88252.1 U7_DriverChannelDRV88252.12 U7_DriverChannelDRV88252.13 | length 213.4
  Top Layer w8: U7_DriverChannelDRV88252.12@2745.16,842.8 U7_DriverChannelDRV88252.13@2770.75,842.8 2770.75,804.25 2780,795 2835,795 2850,810 C67_DriverChannelDRV88252.2@2850,750
NetC67_DriverChannelDRV88253_2: C67_DriverChannelDRV88253.2 R31_DriverChannelDRV88253.1 U7_DriverChannelDRV88253.12 U7_DriverChannelDRV88253.13 | length 213.4
  Top Layer w8: U7_DriverChannelDRV88253.12@3670.16,842.8 U7_DriverChannelDRV88253.13@3695.75,842.8 3695.75,804.25 3705,795 3760,795 3775,810 C67_DriverChannelDRV88253.2@3775,750
NetC67_DriverChannelDRV88254_2: C67_DriverChannelDRV88254.2 R31_DriverChannelDRV88254.1 U7_DriverChannelDRV88254.12 U7_DriverChannelDRV88254.13 | length 213.4
  Top Layer w8: U7_DriverChannelDRV88254.12@4595.16,842.8 U7_DriverChannelDRV88254.13@4620.75,842.8 4620.75,804.25 4630,795 4685,795 4700,810 C67_DriverChannelDRV88254.2@4700,750
NetC67_DriverChannelDRV88255_2: C67_DriverChannelDRV88255.2 R31_DriverChannelDRV88255.1 U7_DriverChannelDRV88255.12 U7_DriverChannelDRV88255.13 | length 213.4
  Top Layer w8: U7_DriverChannelDRV88255.12@5520.16,842.8 U7_DriverChannelDRV88255.13@5545.75,842.8 5545.75,804.25 5555,795 5610,795 5625,810 C67_DriverChannelDRV88255.2@5625,750
NetC68_DriverChannelDRV88251_1: C68_DriverChannelDRV88251.1 U7_DriverChannelDRV88251.1 | length 128.8
  Top Layer w8: C68_DriverChannelDRV88251.1@1427.56,800 1470.35,842.8 U7_DriverChannelDRV88251.1@1538.66,842.8
NetC68_DriverChannelDRV88251_2: C68_DriverChannelDRV88251.2 U7_DriverChannelDRV88251.2 | length 280.9
  Top Layer w8: C68_DriverChannelDRV88251.2@1372.44,800 1372.44,827.44 1385,840 1447.76,840 1464.56,856.8 1501.8,856.8 1531.26,886.26 1553.74,886.26 1564.25,875.75 U7_DriverChannelDRV88251.2@1564.25,842.8
NetC68_DriverChannelDRV88252_1: C68_DriverChannelDRV88252.1 U7_DriverChannelDRV88252.1 | length 128.8
  Top Layer w8: C68_DriverChannelDRV88252.1@2352.56,800 2395.35,842.8 U7_DriverChannelDRV88252.1@2463.66,842.8
NetC68_DriverChannelDRV88252_2: C68_DriverChannelDRV88252.2 U7_DriverChannelDRV88252.2 | length 280.9
  Top Layer w8: C68_DriverChannelDRV88252.2@2297.44,800 2297.44,827.44 2310,840 2372.76,840 2389.56,856.8 2426.8,856.8 2456.26,886.26 2478.74,886.26 2489.25,875.75 U7_DriverChannelDRV88252.2@2489.25,842.8
NetC68_DriverChannelDRV88253_1: C68_DriverChannelDRV88253.1 U7_DriverChannelDRV88253.1 | length 128.8
  Top Layer w8: C68_DriverChannelDRV88253.1@3277.56,800 3320.35,842.8 U7_DriverChannelDRV88253.1@3388.66,842.8
NetC68_DriverChannelDRV88253_2: C68_DriverChannelDRV88253.2 U7_DriverChannelDRV88253.2 | length 280.9
  Top Layer w8: C68_DriverChannelDRV88253.2@3222.44,800 3222.44,827.44 3235,840 3297.76,840 3314.56,856.8 3351.8,856.8 3381.26,886.26 3403.74,886.26 3414.25,875.75 U7_DriverChannelDRV88253.2@3414.25,842.8
NetC68_DriverChannelDRV88254_1: C68_DriverChannelDRV88254.1 U7_DriverChannelDRV88254.1 | length 128.8
  Top Layer w8: C68_DriverChannelDRV88254.1@4202.56,800 4245.35,842.8 U7_DriverChannelDRV88254.1@4313.66,842.8
NetC68_DriverChannelDRV88254_2: C68_DriverChannelDRV88254.2 U7_DriverChannelDRV88254.2 | length 280.9
  Top Layer w8: C68_DriverChannelDRV88254.2@4147.44,800 4147.44,827.44 4160,840 4222.76,840 4239.56,856.8 4276.8,856.8 4306.26,886.26 4328.74,886.26 4339.25,875.75 U7_DriverChannelDRV88254.2@4339.25,842.8
NetC68_DriverChannelDRV88255_1: C68_DriverChannelDRV88255.1 U7_DriverChannelDRV88255.1 | length 128.8
  Top Layer w8: C68_DriverChannelDRV88255.1@5127.56,800 5170.35,842.8 U7_DriverChannelDRV88255.1@5238.66,842.8
NetC68_DriverChannelDRV88255_2: C68_DriverChannelDRV88255.2 U7_DriverChannelDRV88255.2 | length 280.9
  Top Layer w8: C68_DriverChannelDRV88255.2@5072.44,800 5072.44,827.44 5085,840 5147.76,840 5164.56,856.8 5201.8,856.8 5231.26,886.26 5253.74,886.26 5264.25,875.75 U7_DriverChannelDRV88255.2@5264.25,842.8
NetC71_DriverChannelDRV88251_2: C71_DriverChannelDRV88251.2 U7_DriverChannelDRV88251.15 | length 222.1
  Top Layer w8: U7_DriverChannelDRV88251.15@1871.34,1067.2 1871.34,1116.34 1900,1145 C71_DriverChannelDRV88251.2@2032.44,1145
NetC71_DriverChannelDRV88252_2: C71_DriverChannelDRV88252.2 U7_DriverChannelDRV88252.15 | length 222.1
  Top Layer w8: U7_DriverChannelDRV88252.15@2796.34,1067.2 2796.34,1116.34 2825,1145 C71_DriverChannelDRV88252.2@2957.44,1145
NetC71_DriverChannelDRV88253_2: C71_DriverChannelDRV88253.2 U7_DriverChannelDRV88253.15 | length 222.1
  Top Layer w8: U7_DriverChannelDRV88253.15@3721.34,1067.2 3721.34,1116.34 3750,1145 C71_DriverChannelDRV88253.2@3882.44,1145
NetC71_DriverChannelDRV88254_2: C71_DriverChannelDRV88254.2 U7_DriverChannelDRV88254.15 | length 222.1
  Top Layer w8: U7_DriverChannelDRV88254.15@4646.34,1067.2 4646.34,1116.34 4675,1145 C71_DriverChannelDRV88254.2@4807.44,1145
NetC71_DriverChannelDRV88255_2: C71_DriverChannelDRV88255.2 U7_DriverChannelDRV88255.15 | length 222.1
  Top Layer w8: U7_DriverChannelDRV88255.15@5571.34,1067.2 5571.34,1116.34 5600,1145 C71_DriverChannelDRV88255.2@5732.44,1145
NetD1_2: D1.2 R1.1 | length 56.1
  Top Layer w12: R1.1@3989.53,3870 D1.2@4045.63,3870
NetD2_FETChannel1_1: D2_FETChannel1.1 R4_FETChannel1.1 | length 83.9
  Top Layer w15: D2_FETChannel1.1@320.08,3621.5 321.57,3623 R4_FETChannel1.1@403.39,3623
NetD2_FETChannel1_2: D2_FETChannel1.2 D3_FETChannel1.1 FC1_FETChannel1.2 FET_TP_GND_FETChannel1.1 Q1_FETChannel1.2
NetD2_FETChannel2_1: D2_FETChannel2.1 R4_FETChannel2.1 | length 83.9
  Top Layer w15: D2_FETChannel2.1@845.08,3621.5 846.57,3623 R4_FETChannel2.1@928.39,3623
NetD2_FETChannel2_2: D2_FETChannel2.2 D3_FETChannel2.1 FC1_FETChannel2.2 FET_TP_GND_FETChannel2.1 Q1_FETChannel2.2
NetD2_FETChannel3_1: D2_FETChannel3.1 R4_FETChannel3.1 | length 83.9
  Top Layer w15: D2_FETChannel3.1@1370.08,3621.5 1371.57,3623 R4_FETChannel3.1@1453.39,3623
NetD2_FETChannel3_2: D2_FETChannel3.2 D3_FETChannel3.1 FC1_FETChannel3.2 FET_TP_GND_FETChannel3.1 Q1_FETChannel3.2
NetD2_FETChannel4_1: D2_FETChannel4.1 R4_FETChannel4.1 | length 83.9
  Top Layer w15: D2_FETChannel4.1@1895.08,3621.5 1896.57,3623 R4_FETChannel4.1@1978.39,3623
NetD2_FETChannel4_2: D2_FETChannel4.2 D3_FETChannel4.1 FC1_FETChannel4.2 FET_TP_GND_FETChannel4.1 Q1_FETChannel4.2
NetD2_FETChannel5_1: D2_FETChannel5.1 R4_FETChannel5.1 | length 83.9
  Top Layer w15: D2_FETChannel5.1@2420.08,3621.5 2421.57,3623 R4_FETChannel5.1@2503.39,3623
NetD2_FETChannel5_2: D2_FETChannel5.2 D3_FETChannel5.1 FC1_FETChannel5.2 FET_TP_GND_FETChannel5.1 Q1_FETChannel5.2
NetD2_FETChannel6_1: D2_FETChannel6.1 R4_FETChannel6.1 | length 83.9
  Top Layer w15: D2_FETChannel6.1@2945.08,3621.5 2946.57,3623 R4_FETChannel6.1@3028.39,3623
NetD2_FETChannel6_2: D2_FETChannel6.2 D3_FETChannel6.1 FC1_FETChannel6.2 FET_TP_GND_FETChannel6.1 Q1_FETChannel6.2
NetD7_2: D7.2 R8.1 | length 58.5
  Top Layer w15: R8.1@5370,2198.31 D7.2@5370,2256.77
NetD9_2: D9.2 R11.1 | length 70.5
  Top Layer w10: R11.1@5144.58,1875 5215,1875 D9.2@5215.08,1875.08
NetDBGEN1_2: DBGEN1.2 R22.2 R29.1 | length 40.9
  Top Layer w8: R22.2@4394.53,1715 R29.1@4435.47,1715
NetEXP0_17: EXP0.17
NetF1_1: "Power Input1.3" F1.1
  other v1: 5710,3125 5745,3125 5780,3125 5815,3125 5850,3125 5885,3125 5920,3125 5710,3160 5745,3160 5780,3160 5815,3160 5850,3160 5885,3160 5920,3160 5710,3190 5745,3190 5780,3190 5815,3190 5850,3190 5885,3190 5920,3190 5710,3225 5745,3225 5780,3225 5815,3225 5850,3225 5885,3225 5920,3225 5710,3260 5745,3260 5780,3260 5815,3260 5850,3260 5885,3260 5920,3260 5710,3295 5745,3295 5780,3295 5815,3295 5850,3295 5885,3295 5920,3295 5710,3330 5745,3330 5780,3330 5815,3330 5850,3330 5885,3330 5920,3330 5710,3365 5745,3365 5780,3365 5815,3365 5850,3365 5885,3365 5920,3365 5710,3400 5745,3400 5780,3400 5815,3400 5850,3400 5885,3400 5920,3400 5710,3435 5745,3435 5780,3435 5815,3435 5850,3435 5885,3435 5920,3435 5710,3470 5745,3470 5780,3470 5815,3470 5850,3470 5885,3470 5920,3470 5710,3505 5745,3505 5780,3505 5815,3505 5850,3505 5885,3505 5920,3505
NetF2_1: "Power Input1.1" F2.1
  other v1: 5710,3575 5745,3575 5780,3575 5815,3575 5850,3575 5885,3575 5920,3575 5710,3610 5745,3610 5780,3610 5815,3610 5850,3610 5885,3610 5920,3610 5710,3645 5745,3645 5780,3645 5815,3645 5850,3645 5885,3645 5920,3645 5710,3680 5745,3680 5780,3680 5815,3680 5850,3680 5885,3680 5920,3680 5710,3715 5745,3715 5780,3715 5815,3715 5850,3715 5885,3715 5920,3715
NetF3_1: "Power Input1.5" F3.1
  other v1: 5710,2725 5745,2725 5780,2725 5815,2725 5850,2725 5885,2725 5920,2725 5710,2760 5745,2760 5780,2760 5815,2760 5850,2760 5885,2760 5920,2760 5710,2795 5745,2795 5780,2795 5815,2795 5850,2795 5885,2795 5920,2795 5710,2830 5745,2830 5780,2830 5815,2830 5850,2830 5885,2830 5920,2830 5710,2865 5745,2865 5780,2865 5815,2865 5850,2865 5885,2865 5920,2865 5710,2900 5745,2900 5780,2900 5815,2900 5850,2900 5885,2900 5920,2900 5710,2935 5745,2935 5780,2935 5815,2935 5850,2935 5885,2935 5920,2935 5710,2970 5745,2970 5780,2970 5815,2970 5850,2970 5885,2970 5920,2970 5710,3005 5745,3005 5780,3005 5815,3005 5850,3005 5885,3005 5920,3005 5710,3040 5745,3040 5780,3040 5815,3040 5850,3040 5885,3040 5920,3040 5710,3075 5745,3075 5780,3075 5815,3075 5850,3075 5885,3075 5920,3075
NetF4_2: "Logic Source1.2" F4.2 | length 239.5
  Top Layer w40: 4868.58,2520.04 4927.64,2579.09 F4.2@5083.58,2579.09
NetFB6_2: FB6.2 USB.6 | length 159.5
  Top Layer w22: FB6.2@278.62,2380 342,2380 USB.6@410,2448
NetFB7_2: FB7.2 USB.4 | length 229.2
  Top Layer w25: USB.4@517,2635 517,2583 551.38,2548.62 FB7.2@680,2548.62
NetFB8_2: FB8.2 USB.5 | length 146.1
  Top Layer w22: FB8.2@298.62,3005 326.22,3005 USB.5@410,2921.22
NetL2_1: L2.1 U2.1 U2.2 U2.3
NetM1_DriverChannelDRV88251_1: M1_DriverChannelDRV88251.1 U7_DriverChannelDRV88251.5 | length 703.4
  Top Layer w14: v1(1641.02,780) U7_DriverChannelDRV88251.5@1641.02,842.8
  Bottom Layer w39: M1_DriverChannelDRV88251.1@1555,175 1555,230 1610,285 1610,748.98 v1(1641.02,780)
NetM1_DriverChannelDRV88251_2: M1_DriverChannelDRV88251.2 U7_DriverChannelDRV88251.7 | length 683.2
  Top Layer w14: v1(1680,740) 1692.2,752.2 U7_DriverChannelDRV88251.7@1692.2,842.8
  Bottom Layer w39: M1_DriverChannelDRV88251.2@1655,175 1655,715 v1(1680,740)
NetM1_DriverChannelDRV88251_3: M1_DriverChannelDRV88251.3 U7_DriverChannelDRV88251.8 | length 665.9
  Top Layer w14: 1717.8,753.23 U7_DriverChannelDRV88251.8@1717.8,842.8
  Bottom Layer w39: v1(1730,741.02) 1755,716.02 M1_DriverChannelDRV88251.3@1755,175
NetM1_DriverChannelDRV88251_4: M1_DriverChannelDRV88251.4 U7_DriverChannelDRV88251.10 | length 700
  Top Layer w14: v1@1768.98,782.98 U7_DriverChannelDRV88251.10@1768.98,842.8
  Bottom Layer w39: v1(1770,780) 1800,750 1800,290 1855,235 M1_DriverChannelDRV88251.4@1855,175
NetM1_DriverChannelDRV88252_1: M1_DriverChannelDRV88252.1 U7_DriverChannelDRV88252.5 | length 703.4
  Top Layer w14: v1(2566.02,780) U7_DriverChannelDRV88252.5@2566.02,842.8
  Bottom Layer w39: M1_DriverChannelDRV88252.1@2480,175 2480,230 2535,285 2535,748.98 v1(2566.02,780)
NetM1_DriverChannelDRV88252_2: M1_DriverChannelDRV88252.2 U7_DriverChannelDRV88252.7 | length 683.2
  Top Layer w14: v1(2605,740) 2617.2,752.2 U7_DriverChannelDRV88252.7@2617.2,842.8
  Bottom Layer w39: M1_DriverChannelDRV88252.2@2580,175 2580,715 v1(2605,740)